# Altium PCB 教育无人机.PcbDoc
Units mil, origin at the board's own origin, x right, y up, seen from the top; angles counter-clockwise.
Board outline 1574 x 1575 mil, 2 copper layers (Top Layer, Bottom Layer); 37 components, 30 nets, 136 pads, 71 vias.
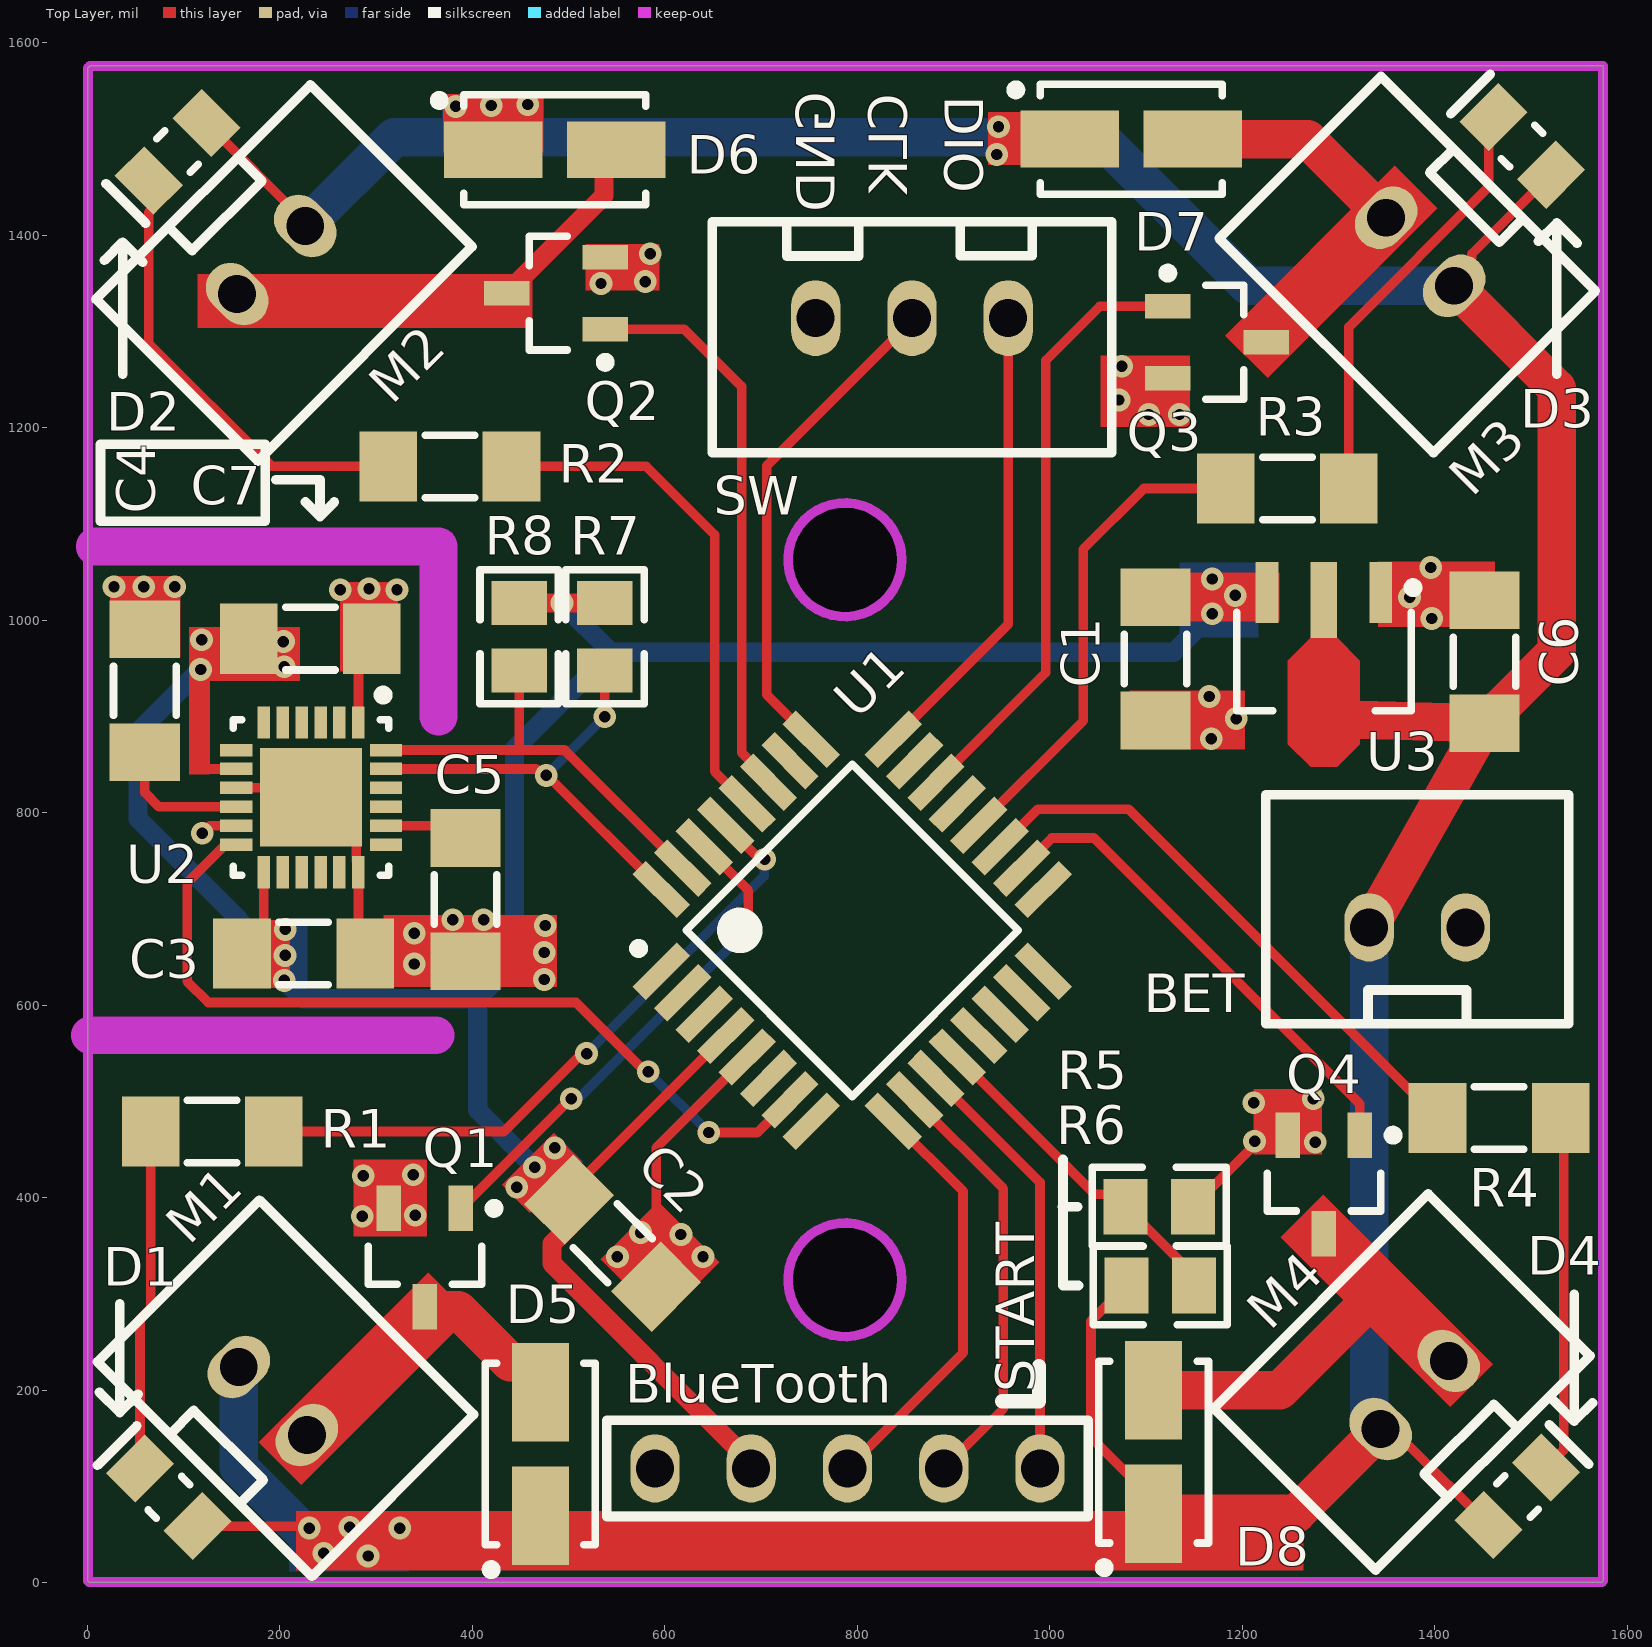
[diagram p0: Top Layer view]
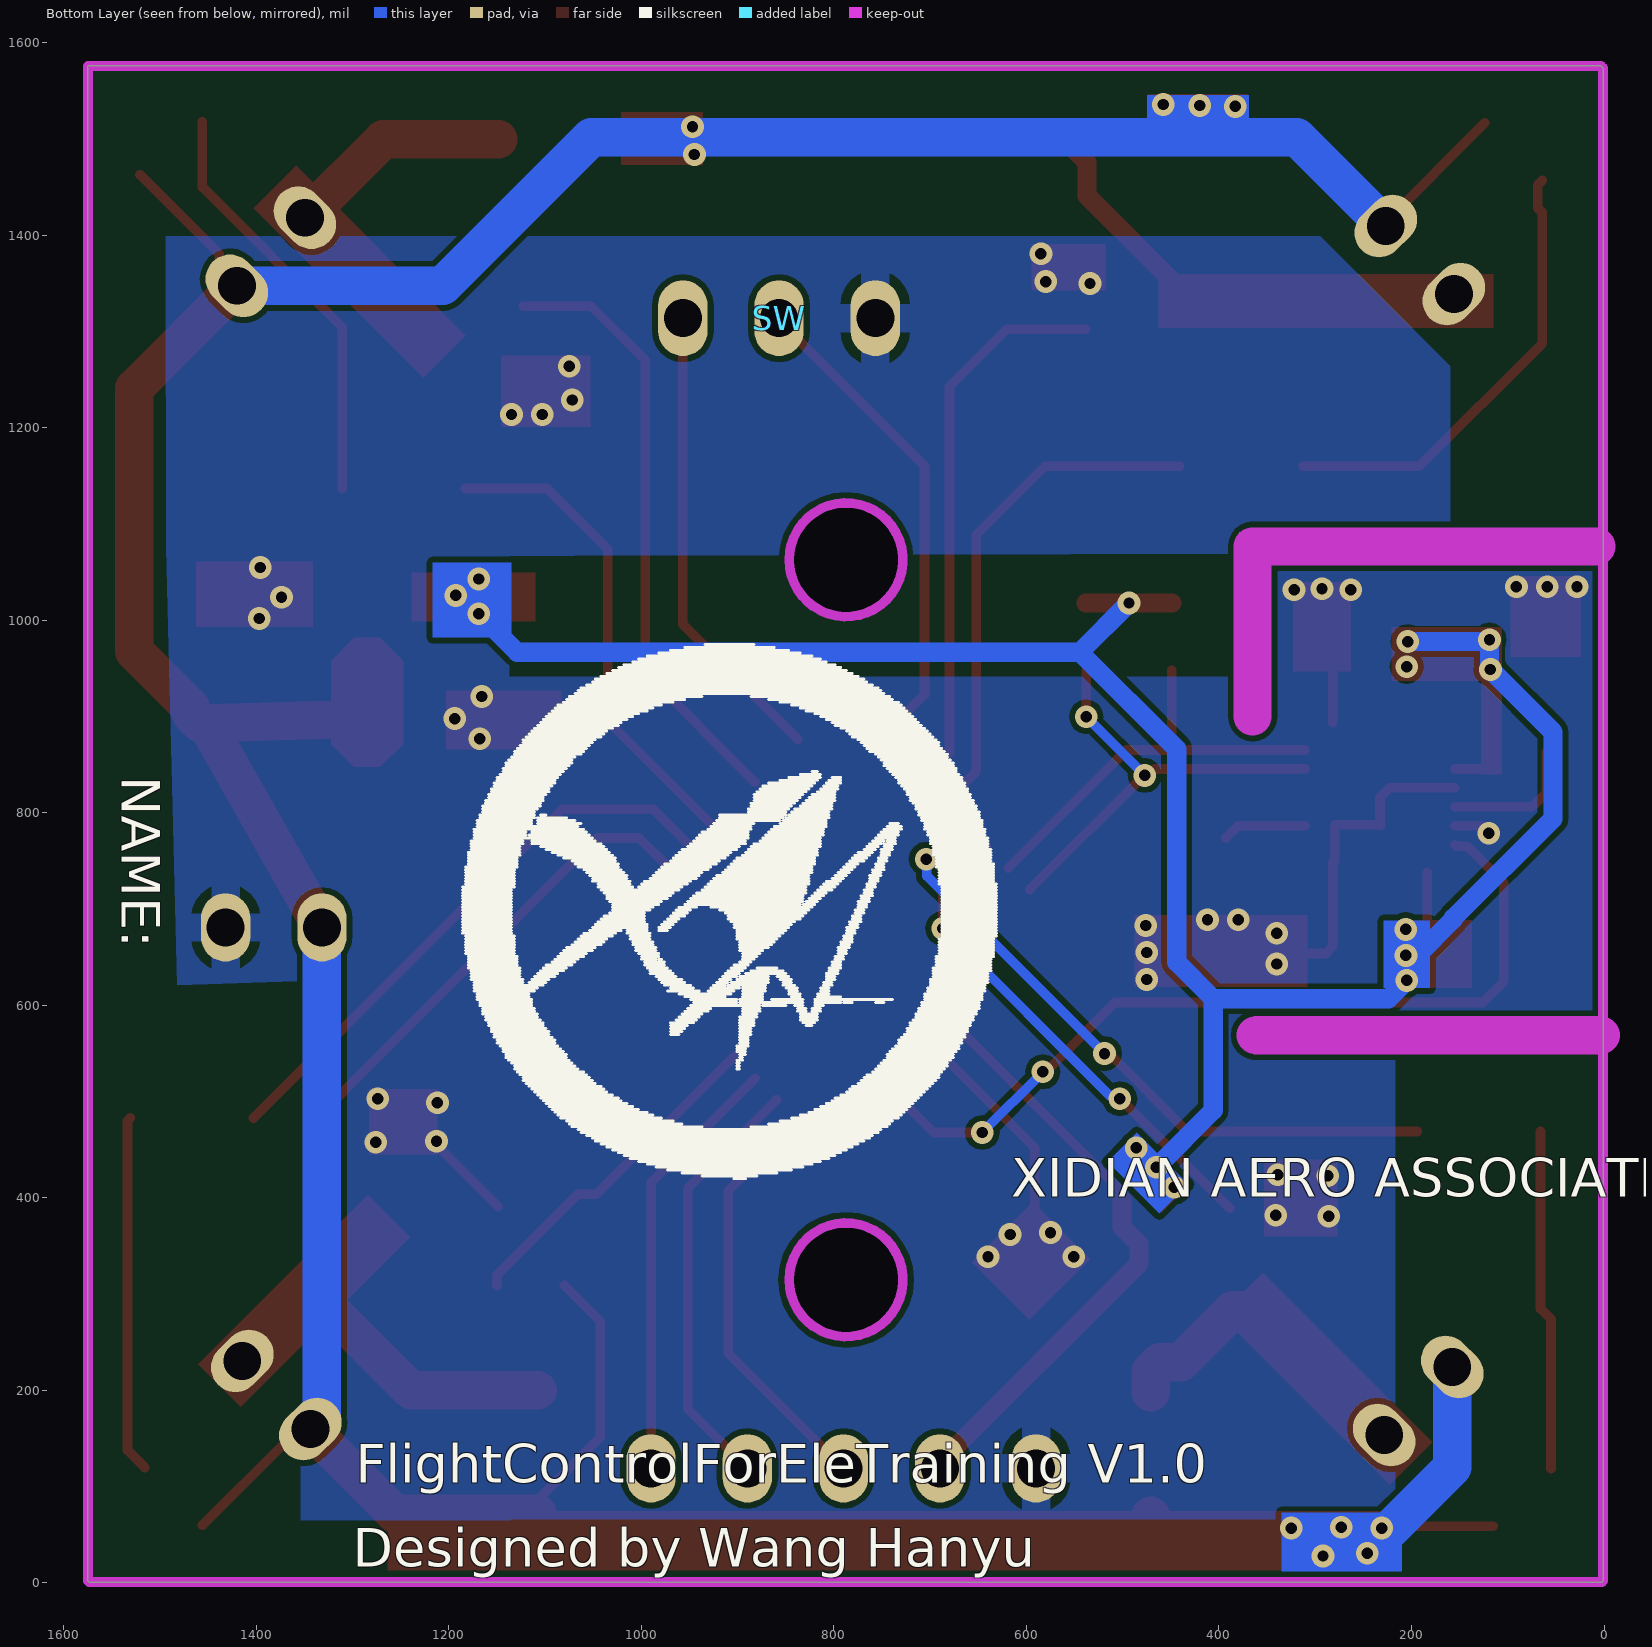
[diagram p1: Bottom Layer view, seen from below]

## Layer stack, top to bottom
Top Solder: solder mask 0.4, Solder Resist, Dk 3.5
Top Layer: signal copper 1.4
Dielectric 1: dielectric 12.6, FR-4, Dk 4.8
Bottom Layer: signal copper 1.4
Bottom Solder: solder mask 0.4, Solder Resist, Dk 3.5

## Board outline
1,2 2,1 1574,1 1575,2 1575,1576 3,1576 1,1574
cut-out: 729,1062.99 cw(c787.73,1062.99) 846.46,1062.99 cw(c787.73,1062.99)
cut-out: 729,314.96 cw(c787.73,314.96) 846.46,314.96 cw(c787.73,314.96)
cut-out: 0,588 364,588 364,550 0,550
cut-out: 1,1091 379,1091 379,891 374,886 356,886 356,887 346,897 346,1058 1,1058

## Design rules (kind name [scope] priority, off if disabled: settings)
Clearance [All] p1: gap=6 ignorepadtopadclearanceinfootprint=FALSE except(0: Arc-Hole Track-Hole SMDPad-Hole THPad-Hole Via-Hole Fill-Hole Poly-Hole Region-Hole Text-Hole)
MinimumSolderMaskSliver [All] p1: minsoldermaskwidth=1
PolygonConnect [All] p1: thpad.connectstyle=Relief thpad.reliefconductorwidth=30 thpad.reliefentries=4 thpad.polygonreliefangle="90 Angle" thpad.airgapwidth=10 smdpad.connectstyle=Relief smdpad.reliefconductorwidth=10 smdpad.reliefentries=4 smdpad.polygonreliefangle="90 Angle" smdpad.airgapwidth=10 via.connectstyle=Direct via.reliefconductorwidth=10 via.reliefentries=4 via.polygonreliefangle="90 Angle" via.airgapwidth=10
RoutingVias [All] p1: holewidth=28 width=50 viastyle="Through Hole" minholewidth=28 minwidth=50 maxholewidth=28 maxwidth=50
SilkToSilkClearance [All] p1: silktosilkclearance=0
SilkToSolderMaskClearance [IsPad] p1: minsilkscreentomaskgap=1 clearancetoexposedcopper=TRUE
SolderMaskExpansion [All] p1: expansion=4
Width [All] p1: maxlimit=1000 minlimit=6 preferedwidth=10 minimp=50.000000 maximp=50.000000 favimp=50.000000
27 further rules are at their usual default settings.

## Components (designator, comment, footprint, x,y, rotation, side; value= is the part's Value field where it differs from the comment)
BET "Connector-2" XH2.54TH-2 1382,681 r0 top
BlueTooth "Connector5" 2.54th5 790,119 r180 top
C1 "Cap" 1206m 1110,960 r270 top value=100nF
C2 "Cap" 1206m 546,353 r315 top value=100nF
C3 "Cap" 1206m 225,654 r0 top value=10nF
C4 "Cap" 1206m 60,927 r90 top value=100nF
C5 "Cap" 1206m 393,710 r270 top value=2.2nF
C6 "Cap" 1206m 1452,957 r90 top value=1uF
C7 "Cap" 1206m 232,981 r0 top value=1uF
D1 "LED" D0805M 85,89 r315 top
D2 "LED" D0805M 94,1487 r45 top
D3 "LED" D0805M 1491,1493 r315 top
D4 "LED" D0805M 1486,90 r225 top
D5 "Dio" DO-214ACM 471,134 r90 top
D6 "Dio" DO-214ACM 486,1489 r0 top
D7 "Dio" DO-214ACM 1085,1500 r0 top
D8 "Dio" DO-214ACM 1108,136 r90 top
M1 "Connector-2" XH2.54TH-2 193,189 r315 top
M2 "Connector-2" XH2.54TH-2 191.36,1374.36 r225 top
M3 "Connector-2" XH2.54TH-2 1385,1383 r135 top
M4 "Connector-2" XH2.54TH-2 1379.36,195.36 r45 top
Q1 "NMOS" SOT23-3M 351,338 r270 top
Q2 "NMOS" SOT23-3M 487.18,1340 r180 top
Q3 "NMOS" SOT23-3M 1174,1289 r0 top
Q4 "NMOS" SOT23-3M 1285,414 r270 top
R1 "Res" 1206M 130,469 r180 top value=1K
R2 "Res" 1206M 377.02,1160 r180 top value=1K
R3 "Res" 1206M 1247,1137 r0 top value=1K
R4 "Res" 1206M 1467,483 r0 top value=1K
R5 "Res" LC-0805_R 1114.04,391 r180 top value=1K
R6 "Res" LC-0805_R 1115.04,309 r180 top value=1K
R7 "Res" LC-0805_R 538,983 r90 top value=4k7
R8 "Res" LC-0805_R 449,983 r90 top value=4k7
SW "Connector-3" XH2.54TH-3 857,1314 r180 bottom
U1 "STM32G030K" LQFP32M 795,678 r45 top
U2 "MPU6050" QFN4*4-24M 232.76,816.16 r270 top
U3 "ME6206Axxx" sot89m 1285.06,954.2 r270 top

## Footprints (in the part's own frame and the unit in brackets; to place one, negate y for a bottom-side part, rotate by r counter-clockwise, add the part's x,y. Pads: shape width x height; smd on the part's side, far side on the other; paste and mask are expansions set on the pad)
2.54th5 [mm]
  oval 1.3x1.8 hole 1: 1(-5.08,0) 2(-2.54,0) 3(0,0) 4(2.54,0) 5(5.08,0)
  silkscreen extent -6.35,-1.27 6.35,1.27, body extent -6.35,-1.27 6.35,1.27, height 8
1206m [mm] "Chip Capacitor, 2-Leads, Body 3.20x1.60mm, IPC Low Density"
  rect 1.52x1.85 smd: 1(-1.625,0) 2(1.625,0)
  silkscreen extent -0.65,-0.82 0.65,0.82, body extent -1.6,-0.8 1.6,0.8, height 1.1
1206M [mm] "Chip Capacitor, 2-Leads, Body 3.20x1.60mm, IPC Low Density"
  rect 1.52x1.85 smd: 1(-1.625,0) 2(1.625,0)
  silkscreen extent -0.65,-0.82 0.65,0.82, body extent -1.6,-0.8 1.6,0.8, height 1.1
D0805M [mm] "Chip Capacitor, 2-Leads, Body 2.00x1.20mm, IPC Low Density"
  rect 1.1x1.45 smd: A(1.075,0) K(-1.075,0)
  silkscreen extent -1.93,-0.74 0.15,0.74, body extent -1,-0.6 1,0.6, height 0.5
DO-214ACM [mm] "Molded Diode, 2-Leads, Body 4.40x2.70mm, IPC Medium Density"
  rect 2.6x1.5 smd: A(1.625,0) K(-1.625,0)
  silkscreen extent -3.17,-1.45 2.4,1.45, body extent -2.4,-1.45 2.4,1.45, height 2.44
LC-0805_R [mm]
  rect 1.16x1.47 smd: 1(-0.89,0) 2(0.89,0)
  silkscreen extent -1.77,-1.04 1.77,1.03, body extent -1,-0.62 1,0.63, height 0.49
LQFP32M [mm] "TQFP, 32-Leads, Body 7.00x7.00mm, Pitch 0.80mm, IPC Low Density"
  rect 1.65x0.5 smd: 1(-4.325,2.8) 2(-4.325,2) 3(-4.325,1.2) 4(-4.325,0.4) 5(-4.325,-0.4) 6(-4.325,-1.2) 7(-4.325,-2) 8(-4.325,-2.8) 17(4.325,-2.8) 18(4.325,-2) 19(4.325,-1.2) 20(4.325,-0.4) 21(4.325,0.4) 22(4.325,1.2) 23(4.325,2) 24(4.325,2.8)
  rect 0.5x1.65 smd: 9(-2.8,-4.325) 10(-2,-4.325) 11(-1.2,-4.325) 12(-0.4,-4.325) 13(0.4,-4.325) 14(1.2,-4.325) 15(2,-4.325) 16(2.8,-4.325) 25(2.8,4.325) 26(2,4.325) 27(1.2,4.325) 28(0.4,4.325) 29(-0.4,4.325) 30(-1.2,4.325) 31(-2,4.325) 32(-2.8,4.325)
  silkscreen extent -4.45,-3.1 3.1,3.77, body extent -3.5,-3.5 3.5,3.5, height 1.6
QFN4*4-24M [mm] "PQFN, 24-Leads, Body 4.00x4.00mm, Pitch 0.50mm, Thermal Pad 2.60x2.70mm, IPC Low Density"
  rect 2.6x2.7 smd: 0(0,0)
  rect 0.85x0.33 smd: 1(-1.975,1.25) 2(-1.975,0.75) 3(-1.975,0.25) 4(-1.975,-0.25) 5(-1.975,-0.75) 6(-1.975,-1.25) 13(1.975,-1.25) 14(1.975,-0.75) 15(1.975,-0.25) 16(1.975,0.25) 17(1.975,0.75) 18(1.975,1.25)
  rect 0.33x0.85 smd: 7(-1.25,-1.975) 8(-0.75,-1.975) 9(-0.25,-1.975) 10(0.25,-1.975) 11(0.75,-1.975) 12(1.25,-1.975) 19(1.25,1.975) 20(0.75,1.975) 21(0.25,1.975) 22(-0.25,1.975) 23(-0.75,1.975) 24(-1.25,1.975)
  silkscreen extent -2.82,-2.05 2.05,2.05, body extent -2.05,-2.05 2.05,2.05, height 0.95
SOT23-3M [mm] "SOT23, 3-Leads, Body 2.90x2.45mm, Pitch 0.95mm, IPC Low Density"
  rect 1.2x0.65 smd: 1(-1.3,0.95) 2(-1.3,-0.95) 3(1.3,0)
  silkscreen extent -1.42,-1.5 0.7,1.95, body extent -0.7,-1.5 0.7,1.5, height 1.1
sot89m [mm] "SOT89, 3-Leads, Body 4.50x2.50mm, Pitch 1.50mm, Lead Span 4.1mm, IPC Low Density"
  rect 1.6x0.6 smd: 1(-1.9,1.5) 3(-1.9,-1.5)
  rect 2x0.7 smd: 2(-1.7,0)
  Top Layer region: -0.7,0.35 -0.1,0.95 2.1,0.95 2.7,0.35 2.7,-0.35 2.1,-0.95 -0.1,-0.95 -0.7,-0.35
  silkscreen extent -2.15,-2.3 1.22,2.48, body extent -1.38,-2.3 1.22,2.3, height 1.6
XH2.54TH-2 [mm]
  oval 1.3x1.8 hole 1: 1(-1.27,0) 2(1.27,0)
  silkscreen extent -4,-2.54 4,3.5, body extent -3.8,-2.4 3.8,3.3, height 7
XH2.54TH-3 [mm]
  oval 1.3x2 hole 1: 1(-2.54,0) 2(0,0) 3(2.54,0)
  body extent -5.07,-3.3 5.07,2.4, height 7

## Part data
C1 C2 C3 C4 C5 C6 C7: "Capacitor", LatestRevisionDate=17-Jul-2002, LatestRevisionNote="Re-released for DXP Platform.", PackageDescription="Radial Cap, Thru-Hole; 2 Leads; 0.3 in Pin Spacing", PackageReference=RAD-0.3, Published=8-Jun-2000, Publisher="Altium Limited"
R1 R2 R3 R4 R5 R6 R7 R8: "Resistor", LatestRevisionDate=17-Jul-2002, LatestRevisionNote="Re-released for DXP Platform.", PackageDescription="Axial Device, Thru-Hole; 2 Leads; 0.4 in Pin Spacing", PackageReference=AXIAL-0.4, Published=8-Jun-2000, Publisher="Altium Limited"

## Via types
v1: diameter 23.62, hole 11.81, Top Layer to Bottom Layer, tented both sides, 71 vias

## Nets (pads, with @x,y where several pads share a name; then routed paths per layer and width w, separated by ;. In a path a pad name is that pad's centre, name@x,y a point inside that pad or via, vN(x,y) a via of type N, cw(c..) or ccw(c..) an arc to the next point about the centre after c; other vN are vias at no path point)
+3V3: BlueTooth.4 C1.1 C2.1 C3.1 C7.1 R7.2 R8.2 U1.4 U2.8 U2.13 U3.3 | length 3192
  Top Layer w10: v1(119,980) 167.02,980 C7.1 ; U2.8 118,845.68 v1(118,949) 118,974.5 C7.1@168.02,974.5 ; U2.13 183.54,676.52 C3.1 161.02,649.92 185.94,625 210,649.06 207.06,652 v1(205.79,652) ; C2.1@500.76,406.03 U1.4
  Top Layer w20: R8.2 v1(493.5,1018.04) R7.2 ; C2.1 500.76,370.07 483,352.3 483,332 BlueTooth.4@690,125
  Bottom Layer w20: v1(118,949) 53,884 53,794 156.5,690.5 156.5,689.5 194,652 v1(205.79,652) ; v1@119,949 v1(119,980) 121,978 v1(204,978) ; v1(205,626) 224,607 406,607 ; v1(446.53,411) 446.53,411.53 v1@459.53,424.53 ; v1(465,432) 406,491 406,607 ; v1(493.5,1018.04) 544.54,967 ; v1(1169,1007) 1129,967 544.54,967 ; 406,607 444,645 444,866.46 544.54,967
  other v1: 486,452 206,679 205,952 1193,1026 1169,1043
GND: BET.2 BlueTooth.5 C1.2 C2.2 C3.2 C4.2 C5.2 C6.2 C7.2 Q1.2 Q2.2 Q3.2 Q4.2 R5.1 SW.3 U1.5 U2.0 U2.1 U2.9 U2.11 U2.18 U3.1 | length 907.6
  Top Layer w10: v1(119.69,779) 127.32,786.63 U2.11 ; U2.9 222.91,826 U2.0 U2.0@232.76,787.61 ; U2.0@231.77,786.63 U2.0@232.76,787.61 ; U2.1 281.97,966.99 C7.2 ; C5.2 385.02,654 C3.2 281.97,661.01 U2.18 281.97,748.48 280.47,749.98 279.78,749.98 279.78,787.61 U2.0@232.76,787.61 ; C2.2 591.24,451.97 U1.5 ; R5.1 1210.39,452.31 1210.39,456.39 v1(1213,459)
  other v1: 551,339 640,339 617,362 575,364 286,381 341,382 287,423 339,424 1276,458 1212,499 1274,503 475,627 340,643 475,655 340,675 476,683 380,689 412,689 1168,877 1194,898 1166,921 1397,1002 1374,1024 263,1032 322,1032 293,1033 28,1035 59,1035 91,1035 1396,1055 1103,1214 1135,1214 1072,1229 1075,1264 534,1350 580,1352 585,1381
INT: U1.7 U2.12 | length 874.9
  Top Layer w10: U2.12 153.5,765.45 142.45,765.45 104,727 104,625 126,603 508,603 580,531 v1(583,531) ; v1(646,468) 696.36,468 U1.7
  Bottom Layer w10: v1(583,531) v1(646,468)
L1: R1.1 U1.29 | length 699.8
  Top Layer w10: R1.1 433,469 514,550 v1(519,550) ; U1.29 704,746.73 v1(704,752)
  Bottom Layer w10: v1(519,550) 703.54,734.54 703.54,751.54 v1(704,752)
L2: R2.1 U1.28 | length 533.8
  Top Layer w10: R2.1 581,1160 652,1089 652,843.27 U1.28
L3: R3.1 U1.20 | length 505.8
  Top Layer w10: U1.20 1035,895.73 1035,1074 1098,1137 R3.1
L4: R4.1 U1.19 | length 603.3
  Top Layer w10: U1.19 987.81,804 1082.02,804 R4.1
M1: Q1.1 U1.30 | length 523
  Top Layer w10: Q1.1 502.22,503 v1(503,503) ; U1.30 687,719.19 v1(687,680)
  Bottom Layer w10: v1(503,503) 505.61,505.61 512.61,505.61 v1(687,680)
M2: Q2.1 U1.27 | length 589.1
  Top Layer w10: Q2.1 620.4,1302.6 680,1243 680,862.59 708,834.59 U1.27
M3: Q3.1 U1.22 | length 635.6
  Top Layer w10: U1.22 996,945.81 996,1270 1052.4,1326.4 Q3.1
M4: Q4.1 U1.18 | length 511.2
  Top Layer w10: U1.18 1002.36,774 1046,774 1322.05,497.95 1322.05,465.53 Q4.1
NetC4_1: C4.1 U2.10 | length 143.1
  Top Layer w10: C4.1 60,821 74.69,806.31 U2.10
NetC5_1: C5.1 U2.20 | length 87.7
  Top Layer w10: U2.20 380.35,786.63 C5.1
NetD1_K: D1.K R1.2 | length 354.6
  Top Layer w10: D1.K 55.07,274.05 66.02,285 R1.2
NetD2_K: D2.K R2.2 | length 475.1
  Top Layer w10: D2.K 68.95,1452.2 68.95,1428.65 64.07,1423.78 64.07,1287.93 192,1160 R2.2
NetD3_K: D3.K R3.2 | length 441.2
  Top Layer w10: R3.2 1310.98,1304.98 1456.2,1450.2 D3.K@1456.2,1518.06
NetD4_K: D4.K R4.2 | length 371.8
  Top Layer w10: D4.K 1534,138 1534,479.98 R4.2
NetD5_A: D5.A M1.2 Q1.3 | length 169.5
  Top Layer w40: Q1.3 354.62,283.2 385.78,283.2 439.82,229.16 461.47,229.16 471,219.63 D5.A
NetD6_A: D6.A M2.2 Q2.3 | length 202.6
  Top Layer w20: Q2.3 446.83,1340 449.62,1342.8 449.62,1353.62 537.19,1441.19 537.19,1476.21 D6.A
NetD7_A: D7.A M3.2 Q3.3 | length 234.5
  Top Layer w40: D7.A 1268,1500 M3.2
NetD8_A: D8.A M4.2 Q4.3 | length 371.9
  Top Layer w40: D8.A 1238.98,199.98 1333,294 1351.42,294 M4.2
NetR5_2: R5.2 R6.1 U1.12 | length 350.6
  Top Layer w10: U1.12 1047.02,403.71 1066.29,403.71 R5.2 1150.08,319.92 R6.1
RXD: BlueTooth.2 U1.10 | length 456.8
  Top Layer w10: U1.10 952,409.64 952,181 BlueTooth.2 BlueTooth.2@890,109
SCL: R7.1 U1.32 U2.23 | length 472.2
  Top Layer w10: U2.23 466.63,845.68 473.31,839 v1(477,839) 478.1,839 U1.32 ; v1(538,900) R7.1
  Bottom Layer w10: v1(477,839) v1(538,900)
SDA: R8.1 U1.31 U2.24 | length 441.8
  Top Layer w10: U2.24 449,865.37 ; R8.1 449,865.37 ; U1.31 496.27,865.37 449,865.37
START: BlueTooth.1 U1.11 | length 459.9
  Top Layer w10: U1.11 990,416.19 BlueTooth.1@990,109
SWCLK: SW.2 U1.25 | length 519.5
  Top Layer w10: U1.25 706,922.9 706,1160.36 857,1311.36 SW.2
SWDIO: SW.1 U1.24 | length 487.2
  Top Layer w10: U1.24 957,995.9 SW.1
TXD: BlueTooth.3 U1.9 | length 440.4
  Top Layer w10: BlueTooth.3 910,239 910,407.1 U1.9
VCC: BET.1 C6.1 D1.A D2.A D3.A D4.A D5.K D6.K D7.K D8.K M1.1 M2.1 M3.1 M4.1 R6.2 U3.2 | length 4825.9
  Top Layer w10: D1.A 228.93,59.07 v1(231,57) ; D2.A 226.71,1414.14 M2.1 ; R6.2 1043,272 1043,151.17 1108,86.17 D8.K ; M4.1 1358.84,145.16 1370.99,145.16 D4.A ; M3.1 1420.36,1358.79 1438.59,1377.02 1438.59,1380.73 D3.A
  Top Layer w40: D5.K 471,48.37 480.53,38.84 502.18,38.84 508.02,33 1068.98,33 1076.82,40.84 1098.47,40.84 1108,50.37 D8.K 1256.02,72.02 M4.1 ; 1285,898 C6.1 ; BET.1 C6.1 ; M3.1 1527,1241 1527,968.02 1468.42,909.44 1468.42,902.94 1458.5,893.02 C6.1
  Bottom Layer w40: M1.1 152.82,219.53 152.82,212.23 157.64,207.41 157.64,120.36 v1@246,32 ; M2.1 319,1502 1052,1502 1206.36,1347.64 1403.41,1347.64 1408.23,1342.82 1415.53,1342.82 M3.1 ; BET.1 1332,175.03 1344,163.03 M4.1
  other v1: 292,28 246,31 325,57 273,58 945,1484 947,1513 383,1534 420,1535 458,1536
pads on no net: U1.1 U1.2 U1.3 U1.6 U1.8 U1.13 U1.14 U1.15 U1.16 U1.17 U1.21 U1.23 U1.26 U2.2 U2.3 U2.4 U2.5 U2.6 U2.7 U2.14 U2.15 U2.16 U2.17 U2.19 U2.21 U2.22

## Polygon pours and split planes (outlines as drawn)
GND on Bottom Layer (solid, remove dead copper, pour order 19): 1136.55,65 1135.55,66 217,66 217,570 218,569 362,569 362,941.31 1137.32,941.31
GND on Bottom Layer (solid, remove dead copper, pour order 13): 1137.32,941.31 1137.31,1076 1493.83,1076 1482.49,621.17 1136.55,632.9 1136.55,858
GND on Bottom Layer (solid, remove dead copper, pour order 21): 1493.82,1066 1494.04,1399 295,1399 160,1264 160,1070
GND on Bottom Layer (solid, remove dead copper, pour order 17): 1482.49,621.17 1470.76,632.9 1136.55,632.9 1136.55,65 1483,65
no net on Bottom Layer (solid, remove dead copper, pour order 15): 1305.78,627.16
GND on Bottom Layer (solid, remove dead copper, pour order 11): 8,1077 381,1077 381,569 3,569
no net on Bottom Layer "Bottom Layer-No Net" (solid, remove dead copper, pour order 8): 1013,1666
no net on Bottom Layer "Bottom Layer-No Net 1" (solid, remove dead copper, pour order 6): 1013,1673.5
no net on Bottom Layer "Bottom Layer-No Net 2" (solid, remove dead copper, pour order 4): 1022,1666

## Keep-outs
Keep-Out Layer:
  circle w10: c787.4,1062.99 r59.06
  circle w10: c787.4,314.96 r59.06
  lines w10: 1,2 1,1574 3,1576 1575,1576 1575,2 1574,1 2,1 1,2
  lines w39.37: 3,569 362,569 ; 8,1077 365,1077 365,900

## Other copper
Top Layer:
  rectangle net GND: 518,1343 595,1391
  rectangle net NetD6_A: 115,1304 463,1360
  rectangle net VCC: 370,1486 474,1547
  region net GND: 596.9,272.9 657,333 593.36,396.64 533.26,336.54
  rectangle net GND: 277,360 353,440
  region net NetD5_A: 222.5,101.5 399,278 354.5,322.5 178,146
  rectangle net VCC: 217,13 1264,75
  rectangle net GND: 1212,445 1283,513
  region net NetD8_A: 1461,227 1284.5,403.5 1240,359 1416.5,182.5
  rectangle net VCC: 936,1473 1021,1528
  rectangle net GND: 1053,1201 1146,1275
  region net NetD7_A: 1226.5,1251.5 1403,1428 1358.5,1472.5 1182,1296
  rectangle net GND: 1083,866 1203,927
  rectangle net +3V3: 1110,999 1239,1050
  rectangle net GND: 1341,993 1463,1061
  rectangle net +3V3: 106,937 221,993
  region net +3V3: 460.03,384.5 513.89,438.36 484.89,467.36 431.03,413.5
  rectangle net GND: 263,947 323,1040
  rectangle net GND: 24,962 97,1046
  rectangle net GND: 308,619 488,694
  rectangle net +3V3: 137,618 211,689
  rectangle net +3V3: 106,840 128,991
Bottom Layer:
  rectangle net VCC: 369,1494 475,1546
  rectangle net VCC: 210,12 335,73
  rectangle net +3V3: 1135,982 1217,1060
  region net +3V3: 462.03,383.5 515.89,437.36 485.39,467.86 431.53,414
  rectangle net +3V3: 181,618 229,688
  pour cut-out: 1574.9,616 1354,616 1354,1 1574,1

## Silkscreen, mask and mechanical layers (free items; w line width, h text height)
Top Overlay:
  lines w10: 13,198 34,177 ; 18,1374 37,1393 ; 34,290 34,177 ; 37,1256 37,1393 ; 53,196 34,177 ; 58,1372 37,1393 ; 196,1146 242,1146 242,1108 ; 227,1123 242,1108 ; 257,1123 242,1108 ; 1013,391 1029,391 ; 1014,440 1014,309 1030,309 ; 1508,1394 1527,1413 ; 1524,189 1545,168 ; 1527,1256 1527,1413 ; 1545,300 1545,168 ; 1548,1392 1527,1413 ; 1564,187 1545,168 ; 14,1103 14,1183 185,1183 185,1103 14,1103
  lines w15: 951,189 989,189 989,225
  text "GND" at 777,1549 h40 r90
  text "CLK" at 852,1547 h40 r90
  text "DIO" at 931,1545 h40 r90
  text "START" at 984,198 h40 r90
Bottom Overlay:
  drawing of 699 lines, arcs and shapes, not listed
  text "NAME:" at 1540,838 h40 r90
  text "XIDIAN AERO ASSOCIATION" at 616,401 h40
  text "FlightControlForEleTraining V1.0" at 1297,104 h40
  text "Designed by Wang Hanyu" at 1300,17 h40
Bottom Solder:
  rectangle: 1354,1 1574,615
Mechanical 1:
  circle w10: c787.4,314.96 r59.06
  circle w10: c787.4,1062.99 r59.06
  rectangle: 106,937 221,993
  lines w10: 0,0 1574.8,0 1574.8,1574.8 0,1574.8 0,0
  lines w39.37: 3,569 362,569 ; 8,1077 365,1077 365,900
Drill Drawing:
  circle w10: c1786.67,231.67 r33.33
  lines w10: 1753.33,348.33 1820,348.33 1820,415 1753.33,415 1753.33,348.33
  lines w15: 1693.54,153.33 12264.61,153.33 ; 1693.54,453.33 12264.61,453.33 ; 2244.42,3.33 2244.42,603.33 ; 2784.28,3.33 2784.28,603.33 ; 3873.96,3.33 3873.96,603.33 ; 4379.84,3.33 4379.84,603.33 ; 5113.64,3.33 5113.64,603.33 ; 6613.19,3.33 6613.19,603.33 ; 7203.04,3.33 7203.04,603.33 ; 7948.84,3.33 7948.84,603.33 ; 8698.63,3.33 8698.63,603.33 ; 9552.39,3.33 9552.39,603.33 ; 10886,3.33 10886,603.33 ; 1693.54,3.33 12264.61,3.33 12264.61,603.33 1693.54,603.33 1693.54,3.33
  text "Symbol" at 1783.54,498.33 h72
  text "Count" at 2289.42,498.33 h72
  text "Hole Size" at 2829.28,498.33 h72
  text "Plated" at 3918.96,498.33 h72
  text "Hole Type" at 4424.84,498.33 h72
  text "Drill Layer Pair" at 5158.64,498.33 h72
  text "Via/Pad" at 6658.19,498.33 h72
  text "Pad Shape" at 7248.04,498.33 h72
  text "Template" at 7993.84,498.33 h72
  text "Description" at 8743.63,498.33 h72
  text "Hole Tolerance (+)" at 9597.39,498.33 h72
  text "Hole Tolerance (-)" at 10931,498.33 h72
  text "18" at 2289.42,348.33 h60
  text "1.000mm (39.37mil)" at 2829.28,348.33 h60
  text "PTH" at 3918.96,348.33 h60
  text "Round" at 4424.84,348.33 h60
  text "Top Layer - Bottom Layer" at 5158.64,348.33 h60
  text "Pad" at 6658.19,348.33 h60
  text "Rounded" at 7248.04,348.33 h60
  text "(Mixed)" at 7993.84,348.33 h60
  text "71" at 2289.42,198.33 h60
  text "0.300mm (11.81mil)" at 2829.28,198.33 h60
  text "PTH" at 3918.96,198.33 h60
  text "Round" at 4424.84,198.33 h60
  text "Top Layer - Bottom Layer" at 5158.64,198.33 h60
  text "Via" at 6658.19,198.33 h60
  text "Rounded" at 7248.04,198.33 h60
  text "v60h30m0mx0" at 7993.84,198.33 h60
  text "89 Total" at 2289.42,48.33 h60